# Altium PCB SENSOR_Board.PcbDoc
Units mm, origin at the board's own origin, x right, y up, seen from the top; angles counter-clockwise.
Board outline 19 x 15 mm, 2 copper layers (Top Layer, Bottom Layer), stack 1.569 mm thick; 10 components, 14 nets, 44 pads, 26 vias.
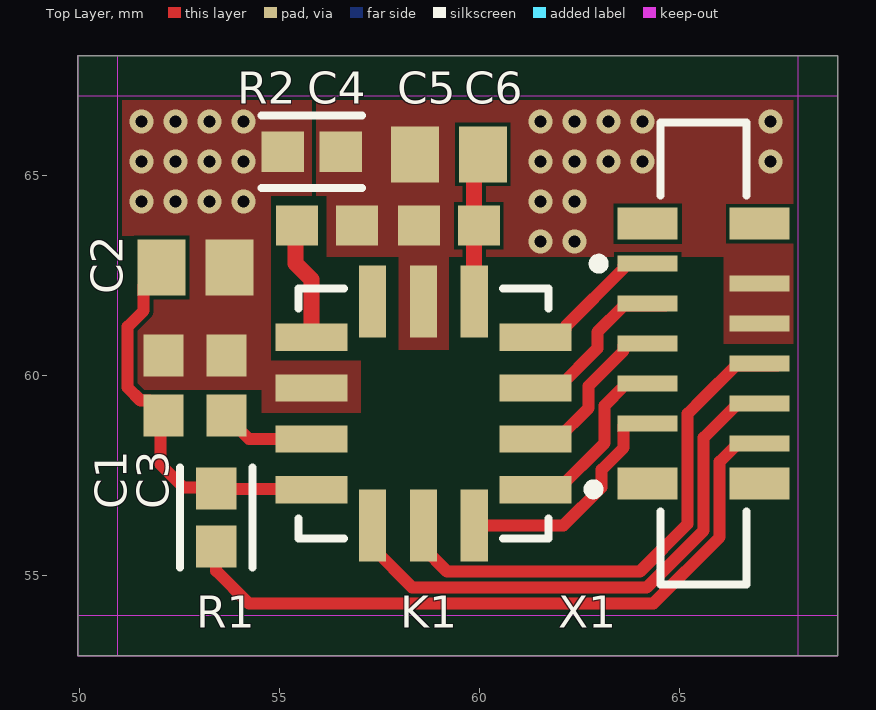
[diagram p0: Top Layer view]
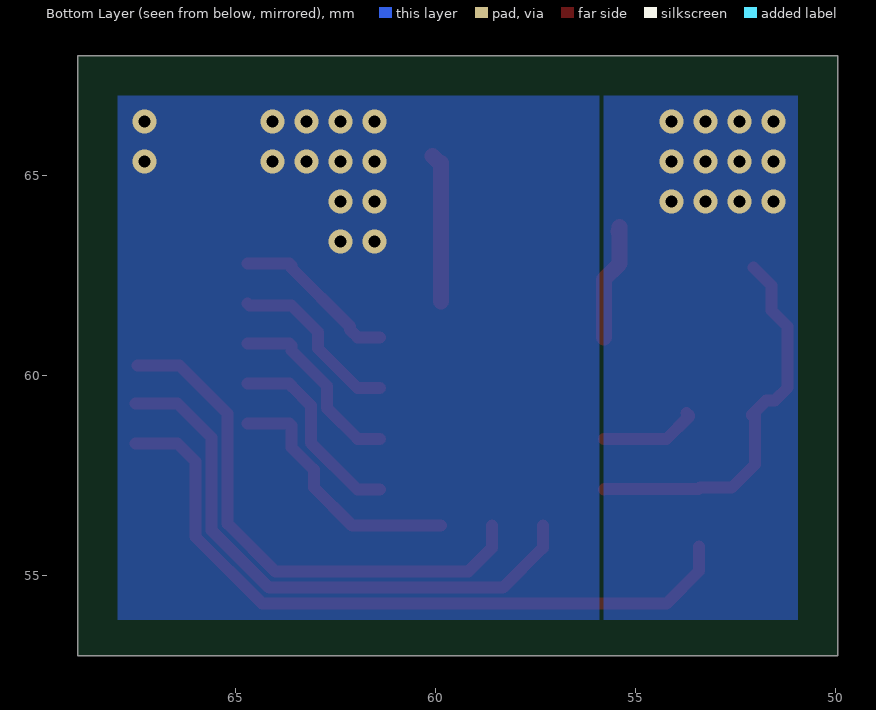
[diagram p1: Bottom Layer view, seen from below]
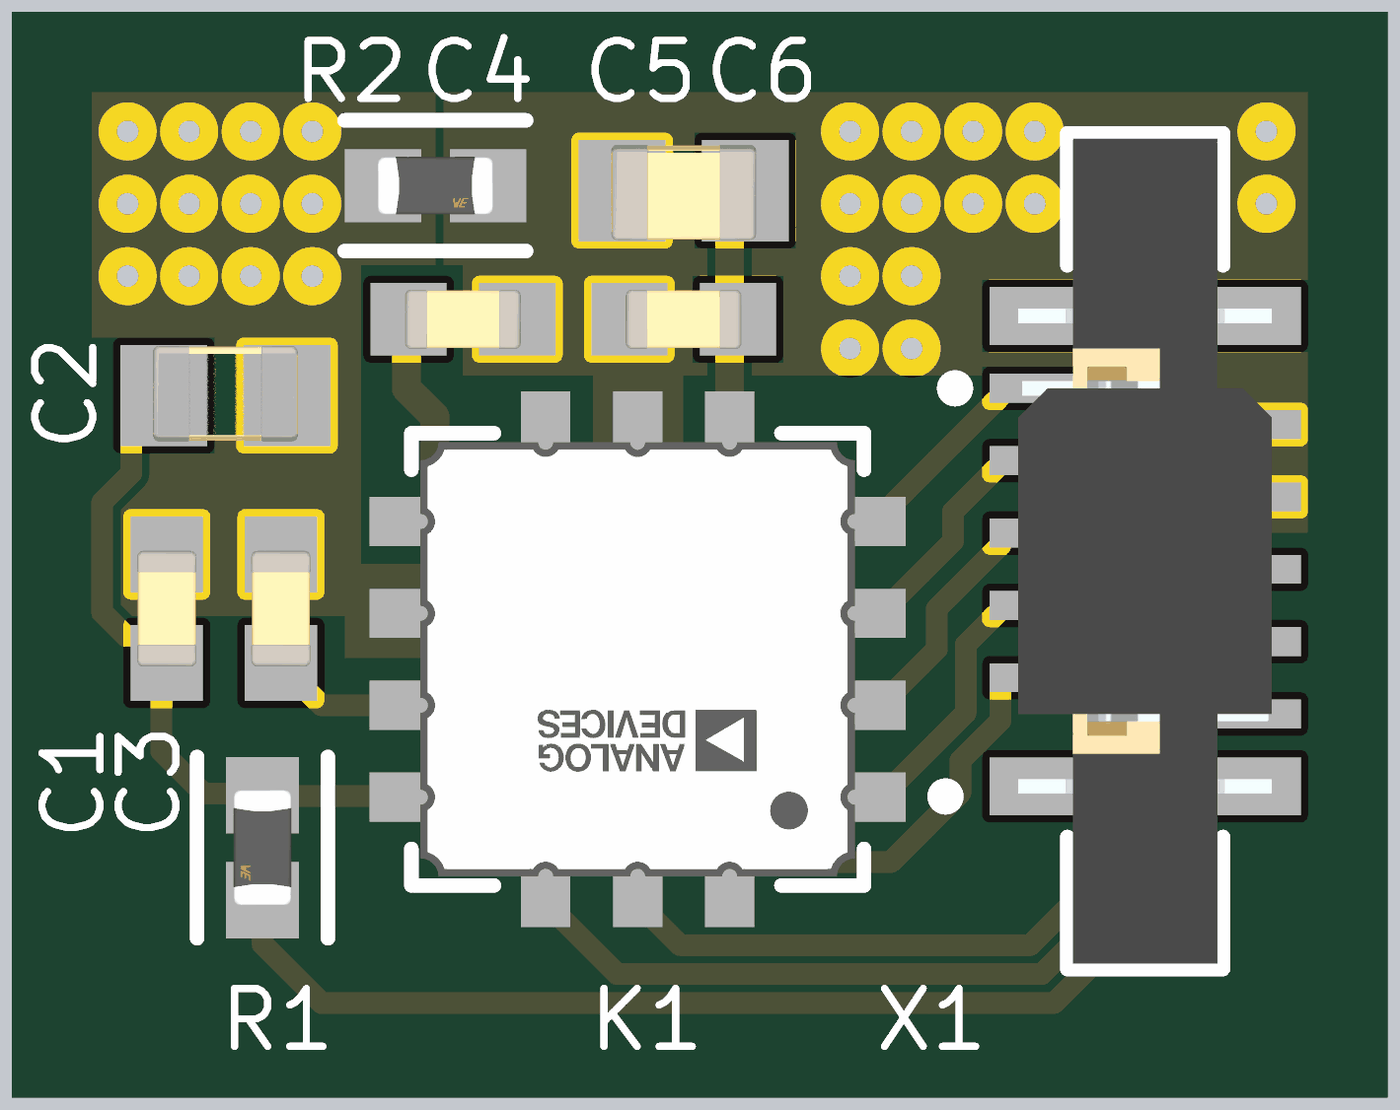
[diagram p2: 3D render of the assembled board from above, using the file's embedded part models]

## Layer stack, top to bottom
Top Solder: solder mask 0.0254, SM-001, Dk 4
Top Layer: signal copper 0.035
Dielectric 1: core 1.4986, Core-043, Dk 4.3
Bottom Layer: signal copper 0.035
Bottom Solder: solder mask 0.0254, SM-001, Dk 4

## Board outline
49.95,53 68.95,53 68.95,68 49.95,68

## Design rules (kind name [scope] priority, off if disabled: settings)
Clearance [All] p1: gap=0.1 ignorepadtopadclearanceinfootprint=FALSE except(0: Arc-Hole Track-Hole SMDPad-Hole THPad-Hole Via-Hole Fill-Hole Poly-Hole Region-Hole Text-Hole)
DiffPairsRouting [All] p1: maxlimit=0.254 minlimit=0.254 mostfreqgap=0.254 toplayer_minwidth=0 toplayer_maxwidth=0.381 toplayer_prefwidth=0.381 bottomlayer_minwidth=0 bottomlayer_maxwidth=0.381 bottomlayer_prefwidth=0.381 maxuncoupledlength=12.7
HoleSize [All] p1: absolutevalues=TRUE maxlimit=10 minlimit=0.025 maxpercent=80.000 minpercent=20.000
MinimumSolderMaskSliver [All] p1: minsoldermaskwidth=0.03
PolygonConnect [All] p1: connectstyle=Direct reliefconductorwidth=0.254 reliefentries=4 polygonreliefangle="90 Angle" airgapwidth=0.254
RoutingVias [All] p1: holewidth=0 width=0 viastyle="Through Hole" minholewidth=0 minwidth=0 maxholewidth=0 maxwidth=1
SilkToSilkClearance [All] p1: silktosilkclearance=0
SilkToSolderMaskClearance [IsPad] p1: minsilkscreentomaskgap=0 clearancetoexposedcopper=TRUE
SolderMaskExpansion [All] p1: expansion=0.102 istentingtop=FALSE
Width [All] p1: maxlimit=5 minlimit=0.15 preferedwidth=0.254
25 further rules are at their usual default settings.

## Components (designator, comment, footprint, x,y, rotation, side; value= is the part's Value field where it differs from the comment)
C1 "100n" CAPC1608X08N 52.091,59.755 r90 top
C2 "10µ" CAPC2012X14N 52.9,62.7 r0 top
C3 "100n" CAPC1608X08N 53.667,59.755 r90 top
C4 "100n" CAPC1608X08N 56.18,63.754 r0 top
C5 "10µ" CAPC2012X14N 59.228,65.532 r180 top
C6 "100n" CAPC1608X08N 59.228,63.754 r180 top
K1 "ADXL355BEZ" FP-E-14-1-MFG 58.593,59.055 r180 top
R1 "300R" "0603 (WE-CBF)" 53.413,56.453 r270 top
R2 "300R" "0603 (WE-CBF)" 55.8,65.6 r0 top
X1 "687310124422" 687310124422 65.6,60.55 r270 top

## Footprints (in the part's own frame and the unit in brackets; to place one, negate y for a bottom-side part, rotate by r counter-clockwise, add the part's x,y. Pads: shape width x height; smd on the part's side, far side on the other; paste and mask are expansions set on the pad)
"0603 (WE-CBF)" [mm]
  rect 1.055x1.006 smd paste+0 mask+0: 1(-0.726,0) 2(0.726,0)
  silkscreen extent -1.25,-0.9 1.25,0.9, body extent -1.5,-0.75 1.5,0.75, height 0.25
687310124422 [mm] "ZIF Connectors, Vertical, Type A, pitch 0.5mm, 10p"
  rect 0.4x1.5 smd: 1(-2.25,-1.4) 2(-1.75,1.4) 3(-1.25,-1.4) 4(-0.75,1.4) 5(-0.25,-1.4) 6(0.25,1.4) 7(0.75,-1.4) 8(1.25,1.4) 9(1.75,-1.4) 10(2.25,1.4)
  rect 0.8x1.5 smd: MP1(-3.25,-1.4) MP2(-3.25,1.4) MP3(3.25,-1.4) MP4(3.25,1.4)
  silkscreen extent -5.77,-2.75 5.78,1.07, body extent -5.7,-1.75 5.7,1.75, height 4.92
CAPC1608X08N [mm] "Chip Capacitor, 2-Leads, Body 1,60x0,80mm, IPC Medium Density"
  rect 1.05x1 smd: 1(-0.75,0) 2(0.75,0)
  body extent -0.8,-0.41 0.8,0.41, height 0.82
CAPC2012X14N [mm] "Chip Capacitor, 2-Leads, Body 2,00x1,25mm, IPC Medium Density"
  rect 1.2x1.4 smd: 1(-0.85,0) 2(0.85,0)
  body extent -1,-0.63 1,0.69, height 1.42
FP-E-14-1-MFG [mm]
  rect 1.8x0.68 smd paste+0 mask+0: 1(-2.8,1.905) 2(-2.8,0.635) 3(-2.8,-0.635) 4(-2.8,-1.905) 8(2.8,-1.905) 9(2.8,-0.635) 10(2.8,0.635) 11(2.8,1.905)
  rect 0.68x1.8 smd paste+0 mask+0: 5(-1.27,-2.8) 6(0,-2.8) 7(1.27,-2.8) 12(1.27,2.8) 13(0,2.8) 14(-1.27,2.8)
  silkscreen extent -4.38,-3.13 3.13,3.13, body extent -3.8,-3.8 3.8,3.8, height 0.25

## Part data
C1 C3 C4 C6: library part C0603C104K5RACTU, "100n, 0603, X7R, 10%, 50 V", Dielectric=X7R, Manufacturer=Kemet, Supplier Part Number 1=399-5089-1-ND, Tolerance=10%, Voltage Rating="50 V", ComponentLink1Description=Datasheet, ComponentLink1URL=http://www.farnell.com/datasheets/1851736.pdf, Supplier 1=Digi-Key, Supplier 2=Farnell, Supplier 3=Mouser, Supplier Part Number 2=1288255, Supplier Part Number 3=80-C0603C104K5R
C2 C5: library part C0805C106K4PACTU, "10µ, 0805, X5R, 10%, 16 V", Dielectric=X5R, Manufacturer=Kemet, Supplier Part Number 1=399-8012-1-ND, Tolerance=10%, Voltage Rating="16 V", ComponentLink1Description=Datasheet, ComponentLink1URL=http://www.farnell.com/datasheets/1732713.pdf, Supplier 1=Digi-Key, Supplier 2=Farnell, Supplier 3=Mouser, Supplier Part Number 2=1288204, Supplier Part Number 3=80-C0805C106K4P
K1: "ACCELEROMETER2-4-8GDIGTL14QFN", Case/Package=CLCC, Manufacturer="Analog Devices", Max Operating Temperature=125°C, Min Operating Temperature=-40°C, Axis="X, Y, Z", Bandwidth=1.5kHz, Category=Accelerometers, ComponentLink1Description=http://www.farnell.com/datasheets/2200405.pdf?src-supplier=Farnell, ComponentLink1URL=http://www.farnell.com/datasheets/2200405.pdf?src-supplier=Farnell, ComponentLink2Description=https://www.analog.com/media/en/technical-documentation/data-sheets/ADXL354_355.pdf?src-supplier=Digi-Key, ComponentLink2URL=https://www.analog.com/media/en/technical-documentation/data-sheets/ADXL354_355.pdf?src-supplier=Digi-Key, Lead Free="Contains Lead", Manufacturer Part Number=ADXL355BEZ, Mount="Surface Mount", Number of Pins=14, Output Type=SPI,I2C, Packaging=Tray, Pricing 1="1=64,97, 10=59,06, 50=59,06, 100=59,06, 1000=59,06, 10000=59,06 (USD)", RoHS=Yes, RoHS Compliant=Yes, Series=-, Stock 1=9178, Supplier 1=Mouser
R1 R2: library part 742792641, "300R / 100 MHz, 2 A, 0R15, WE-CBF", Case Code (Imperial)=0603, Case Code (Metric)=1608, Case/Package=SMD/SMT, Current Rating=2A, Inductance=18nH, Manufacturer="Wurth Electronics", Max Operating Temperature=125°C, Min Operating Temperature=-55°C, Package Quantity=1, Test Frequency=100MHz, Tolerance=25%, Category="Ferrite Beads and Chips", ComponentLink1Description=https://datasheet.ciiva.com/1466/1705830-1466501.pdf?src-supplier=Element14, ComponentLink1URL=https://datasheet.ciiva.com/1466/1705830-1466501.pdf?src-supplier=Element14, ComponentLink2Description=https://datasheet.ciiva.com/4940/742792641-72209-4940450.pdf?src-supplier=Mouser, ComponentLink2URL=https://datasheet.ciiva.com/4940/742792641-72209-4940450.pdf?src-supplier=Mouser, ComponentLink3Description=https://datasheet.ciiva.com/1013/742792641-1013888.pdf?src-supplier=Digi-Key, ComponentLink3URL=https://datasheet.ciiva.com/1013/742792641-1013888.pdf?src-supplier=Digi-Key, ComponentLink4Description=https://datasheet.ciiva.com/11800/0900766b80d2e072-11800409.pdf?src-supplier=Rs, ComponentLink4URL=https://datasheet.ciiva.com/11800/0900766b80d2e072-11800409.pdf?src-supplier=Rs, ComponentLink5Description=https://datasheet.ciiva.com/1466/1705830-1466502.pdf?src-supplier=Element14, ComponentLink5URL=https://datasheet.ciiva.com/1466/1705830-1466502.pdf?src-supplier=Element14, ComponentLink6Description=https://datasheet.ciiva.com/1013/742792641-1013889.pdf?src-supplier=Digi-Key, ComponentLink6URL=https://datasheet.ciiva.com/1013/742792641-1013889.pdf?src-supplier=Digi-Key, Core Material=Ferrite, Depth=0.8mm, Height=0.8mm, Impedance=300R, Lead Free="Lead Free", Length=1.6mm, Manufacturer Part Number=742792641, Material=Ferrite, Max Current Rating=2A, Max DC Current=2A, Mount="Surface Mount", Number of Lines=1, Packaging="Tape and Reel", Pricing 1="500=0,165, 2500=0,149, 5000=0,134, 12500=0,12 (EUR)", Reach SVHC Compliant=Unknown, RoHS=Yes, RoHS Compliant=Yes, Series=WE-CBF, Stock 1=21100, Supplier 1=Rs, Termination=SMD/SMT, Weight=0.000141oz, Width=0.8mm
X1: "Ffc / Fpc Board Connector, Vertical, Surface Mount, Receptacle, 10, 0.5 Mm Rohs Compliant: Yes", Actuator Color=Black, Current Rating=500mA, Flammability Rating="UL94 V-0", Housing Color=Beige, Insulation Resistance=100MR, Manufacturer="Wurth Electronics", Max Operating Temperature=85°C, Min Operating Temperature=-25°C, Package Quantity=1, Voltage Rating=50V, Actuator Material="Polymer,Liquid Crystal Polymer", Category="FFC / FPC", ComponentLink1Description=https://datasheet.ciiva.com/25617/0900766b81113c2b-25617817.pdf?src-supplier=Rs, ComponentLink1URL=https://datasheet.ciiva.com/25617/0900766b81113c2b-25617817.pdf?src-supplier=Rs, ComponentLink2Description=https://datasheet.ciiva.com/8067/1388844-8067302.pdf?src-supplier=Element14, ComponentLink2URL=https://datasheet.ciiva.com/8067/1388844-8067302.pdf?src-supplier=Element14, ComponentLink3Description=https://datasheet.ciiva.com/670/6873xx124422-670422.pdf?src-supplier=Digi-Key, ComponentLink3URL=https://datasheet.ciiva.com/670/6873xx124422-670422.pdf?src-supplier=Digi-Key, ComponentLink4Description=https://datasheet.ciiva.com/670/6873xx124422-670421.pdf?src-supplier=Digi-Key, ComponentLink4URL=https://datasheet.ciiva.com/670/6873xx124422-670421.pdf?src-supplier=Digi-Key, ComponentLink5Description=https://datasheet.ciiva.com/670/6873xx124422-670423.pdf?src-supplier=Digi-Key, ComponentLink5URL=https://datasheet.ciiva.com/670/6873xx124422-670423.pdf?src-supplier=Digi-Key, ComponentLink6Description=https://datasheet.ciiva.com/29317/709154-da-01-en-smd-zif-stecker-180grad-typ-a-10-pol-29317899.pdf?src-supplier=Conrad, ComponentLink6URL=https://datasheet.ciiva.com/29317/709154-da-01-en-smd-zif-stecker-180grad-typ-a-10-pol-29317899.pdf?src-supplier=Conrad, Contact Location=Side, Contact Material=Bronze,Tin, Contact Plating=Tin, Gender=Receptacle, Housing Material="Liquid Crystal Polymer", Lead Free="Lead Free", Length=11.4mm, Manufacturer Part Number=687310124422, Mating Cycles=25, Mount="Surface Mount", Number of Contacts=10, Number of Positions=10, Number of Rows=2, Orientation=Straight, Packaging="Tape and Reel", Pitch=0.5mm, Pricing 1="50=1,608, 250=1,488, 500=1,298, 1250=1,176 (EUR)", Reach SVHC Compliant=Unknown, RoHS=Yes, RoHS Compliant=Yes, Series=WR-FPC, Stock 1=435, Supplier 1=Rs, Termination=Solder, Width=3.5mm

## Via types
v1: diameter 0.6, hole 0.3, Top Layer to Bottom Layer, 26 vias

## Nets (pads, with @x,y where several pads share a name; then routed paths per layer and width w, separated by ;. In a path a pad name is that pad's centre, name@x,y a point inside that pad or via, vN(x,y) a via of type N, cw(c..) or ccw(c..) an arc to the next point about the centre after c; other vN are vias at no path point)
+3V3: R1.2 X1.10 | length 17.8
  Top Layer w0.3: R1.2 53.413,55.12 54.228,54.305 64.34,54.305 66,55.965 66,57.85 66.45,58.3 X1.10@67.5,58.3
AGND: C1.2 C2.2 C3.2 K1.9 R2.1
  other v1: 51.55,64.35 52.4,64.35 53.25,64.35 54.1,64.35 51.55,65.35 52.4,65.35 53.25,65.35 54.1,65.35 51.55,66.35 52.4,66.35 53.25,66.35 54.1,66.35
CS: K1.1 X1.7 | length 5
  Top Layer w0.3: K1.1 61.953,57.15 63.121,58.319 63.121,59.256 63.6,59.734 63.6,59.75 63.65,59.8 X1.7@64.7,59.8
DGND: C4.2 C5.2 C6.2 K1.6 R2.2 X1.2 X1.4
  other v1: 61.525,63.35 62.375,63.35 61.525,64.35 62.375,64.35 61.525,65.35 62.375,65.35 63.225,65.35 64.075,65.35 67.275,65.35 61.525,66.35 62.375,66.35 63.225,66.35 64.075,66.35 67.275,66.35
DRDY: K1.14 X1.9 | length 6.5
  Top Layer w0.3: K1.14 62.092,56.255 63.048,57.212 63.048,57.652 63.6,58.204 63.6,58.75 63.65,58.8 X1.9@64.7,58.8
INT1: K1.12 X1.8 | length 14.4
  Top Layer w0.3: K1.12 57.323,55.695 58.313,54.705 64.174,54.705 65.6,56.131 65.6,58.45 66.45,59.3 X1.8@67.5,59.3
INT2: K1.13 X1.6 | length 13.4
  Top Layer w0.3: K1.13 58.593,55.695 59.183,55.105 64.009,55.105 65.2,56.296 65.2,59.05 65.595,59.445 66.4,60.25 X1.6@67.45,60.25
MISO: K1.4 X1.1 | length 4.2
  Top Layer w0.3: K1.4 61.953,60.96 62.143,61.15 62.143,61.23 63.6,62.687 63.6,62.75 63.65,62.8 X1.1@64.7,62.8
MOSI: K1.3 X1.3 | length 4.4
  Top Layer w0.3: K1.3 61.953,59.69 62.946,60.683 62.946,61.096 63.6,61.75 64.65,61.75 X1.3@64.7,61.8
NetC1_1: C1.1 C2.1 K1.11 R1.1 | length 9.8
  Top Layer w0.3: C1.1@52.016,59.005 52.016,57.784 52.6,57.2 53.392,57.2 R1.1 53.427,57.164 55.779,57.164 K1.11 ; C2.1 51.6,62.25 51.6,61.625 51.2,61.225 51.2,59.7 51.52,59.38 51.741,59.38 52.091,59.03 C1.1
NetC3_1: C3.1 K1.10 | length 2.5
  Top Layer w0.3: C3.1@53.725,59.062 C3.1 53.667,58.98 54.227,58.42 K1.10
NetC4_1: C4.1 K1.8 | length 3
  Top Layer w0.4: C4.1@55.4,63.574 C4.1@55.43,63.604 ; C4.1@55.4,63.724 55.4,62.8 55.793,62.407 K1.8
NetC5_1: C5.1 C6.1 K1.5 | length 3.8
  Top Layer w0.4: K1.5 C5.1@59.863,65.317 ; C5.1@59.863,65.275 C5.1@60.078,65.49
SCLK: K1.2 X1.5 | length 4.7
  Top Layer w0.3: K1.2 61.953,58.42 62.7,59.167 62.722,59.189 62.722,59.748 63.6,60.627 63.6,60.75 63.65,60.8 X1.5@64.7,60.8
pads on no net: K1.7 X1.MP1 X1.MP2 X1.MP3 X1.MP4

## Polygon pours and split planes (outlines as drawn)
DGND on Top Layer "DGND_L01_P001" (solid, pour order 1): 55.8,67 68.45,67 68.45,60.8 66.1,60.8 66.1,62.975 59.225,62.975 59.225,60.65 57.975,60.65 57.975,62.975 56.175,62.975 56.175,64.5 55.8,64.5
AGND on Top Layer "AGND_L01_P000" (solid, pour order 0): 51.35,63.5 50.95,63.5 50.95,67 55.8,67 55.8,64.5 54.775,64.5 54.775,60.375 57.025,60.375 57.025,59.075 54.55,59.075 54.55,59.65 51.35,59.65
DGND on Bottom Layer "DGND_L02_P004" (solid, pour order 4): 55.8,67 67.95,67 67.95,53.9 55.8,53.9
AGND on Bottom Layer "AGND_L02_P003" (solid, pour order 3): 50.95,67 55.8,67 55.8,53.9 50.95,53.9
no net on Bottom Layer "NONET_L02_P002" (solid, pour order 2): 50.95,67

## Keep-outs
Top Layer:
  rectangle: 49.95,67 68.95,68
  region: 50.95,53 50.95,68 49.95,68 49.95,53
  rectangle: 49.95,53 68.95,54
  region: 68.95,53 68.95,68 67.95,68 67.95,53

## Dimensions
49.95,68 to 68.95,68 on Bottom Layer
49.95,53 to 49.95,68 on Bottom Layer